# Altium PCB Group15_f.PcbDoc
Units mil, origin at the board's own origin, x right, y up, seen from the top; angles counter-clockwise.
Board outline 10825 x 6635 mil, 2 copper layers (Top Layer, Bottom Layer); 40 components, 20 nets, 140 pads, 1 vias.
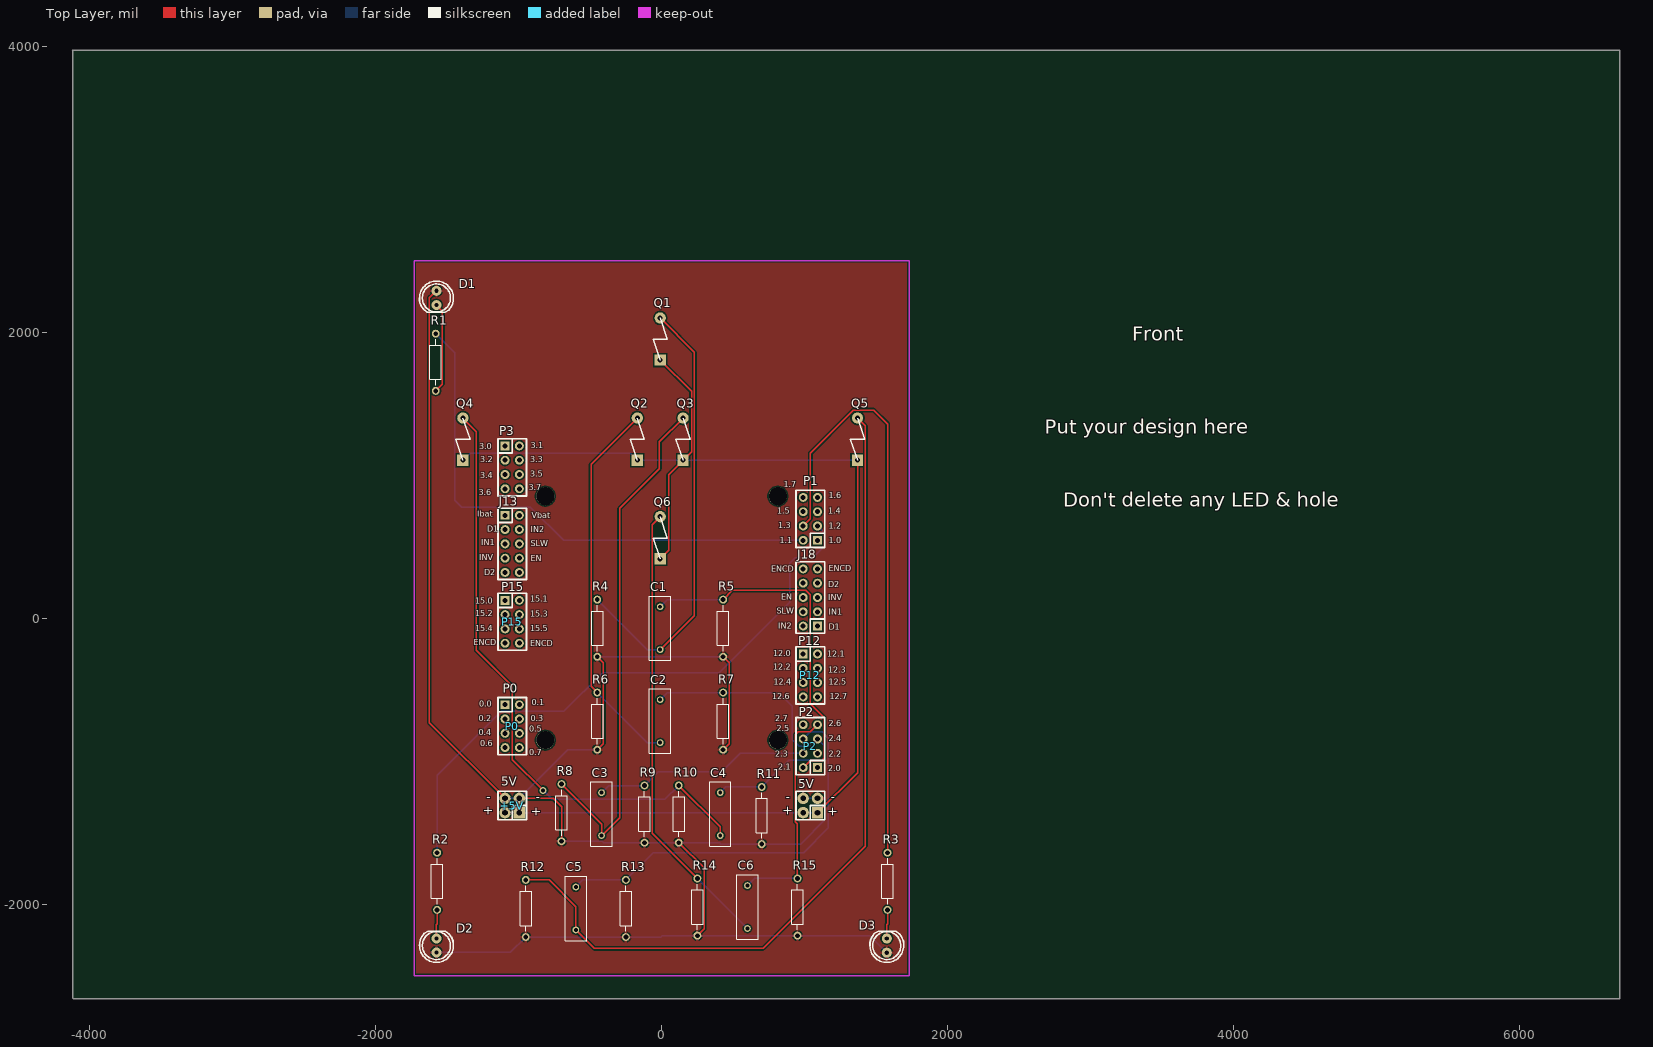
[diagram p0: Top Layer view]
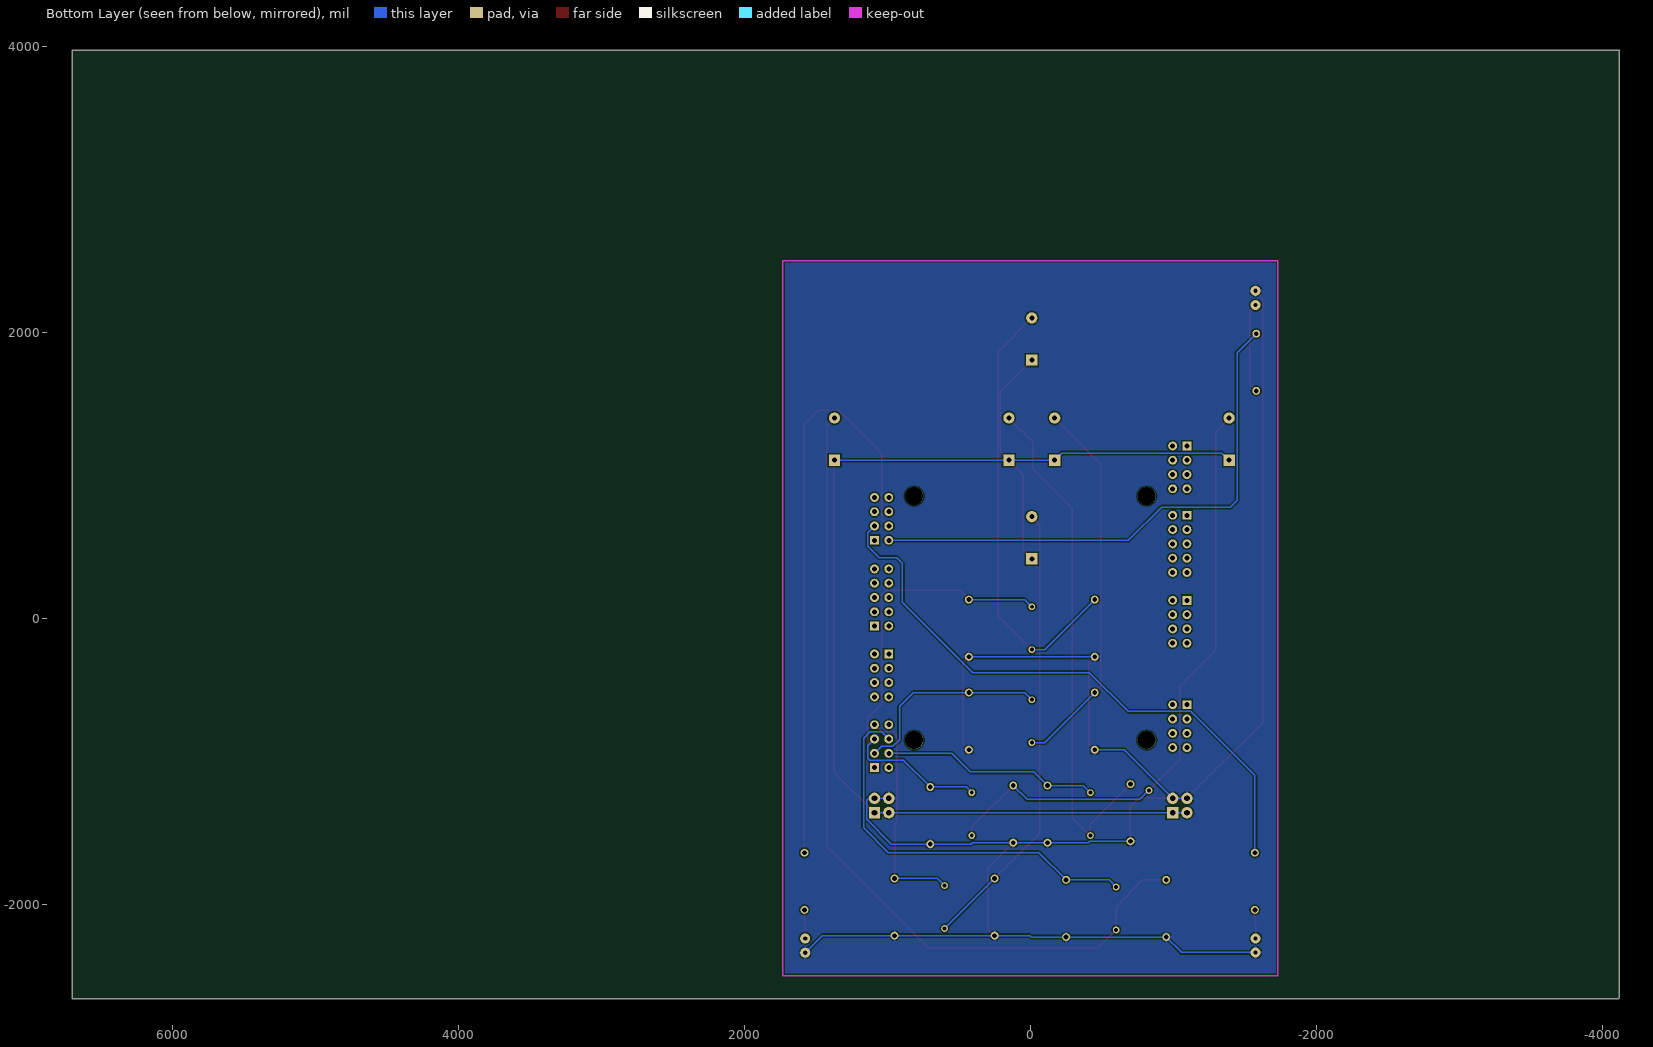
[diagram p1: Bottom Layer view, seen from below]

## Layer stack, top to bottom
Top Solder: solder mask 0.4, Solder Resist, Dk 3.5
Top Layer: signal copper 1.4
Dielectric1: dielectric 12.6, FR-4, Dk 4.8
Bottom Layer: signal copper 1.4
Bottom Solder: solder mask 0.4, Solder Resist, Dk 3.5

## Board outline
-4118.11,-2656.69 -4113.11,-2661.69 6701.89,-2661.69 6701.89,3973.31 -4123.11,3973.31 -4118.11,3968.31 -4118.11,-2656.69

## Design rules (kind name [scope] priority, off if disabled: settings)
Clearance [All] p1: gap=10 ignorepadtopadclearanceinfootprint=FALSE except(0: Arc-Hole Track-Hole SMDPad-Hole THPad-Hole Via-Hole Fill-Hole Poly-Hole Region-Hole Text-Hole)
PolygonConnect [All] p1: connectstyle=Direct reliefconductorwidth=20 reliefentries=4 polygonreliefangle="90 Angle" airgapwidth=10
RoutingVias [All] p1: holewidth=28 width=50 viastyle="Through Hole" minholewidth=28 minwidth=50 maxholewidth=28 maxwidth=50
SilkToSolderMaskClearance SilkscreenOverComponentPads [IsPad] p1: minsilkscreentomaskgap=10 clearancetoexposedcopper=TRUE
SolderMaskExpansion [All] p1: expansion=4 istentingtop=FALSE
Width [All] p1: maxlimit=30 minlimit=10 preferedwidth=10 minimp=50.000000 maximp=50.000000 favimp=50.000000
29 further rules are at their usual default settings.

## Components (designator, comment, footprint, x,y, rotation, side; value= is the part's Value field where it differs from the comment)
5V "5V" IDC4 1090,-1360 r90 top locked
+5V "5V" IDC4 -995,-1360 r90 top locked
C1 "Cap" RAD-0.3 -10,-70 r90 top value=100pF
C2 "Cap" RAD-0.3 -10,-720 r90 top value=10nF
C3 "Cap" RAD-0.3 -420,-1370 r90 top value=10nF
C4 "Cap" RAD-0.3 410,-1370 r90 top value=10nF
C5 "Cap" RAD-0.3 -600,-2030 r90 top value=10nF
C6 "Cap" RAD-0.3 600,-2020 r90 top value=10nF
D1 "LED" LED0.1/5MM#1 -1574.8,2189.76 r180 top locked
D2 "LED" LED0.1/5MM#2 -1574.8,-2239.37 r0 top locked
D3 "LED" LED0.1/5MM#1 1574.8,-2239.37 r0 top locked
J13 "CON10" IDC10 -1095,720 r270 top locked
J18 "CON10" IDC10 1090,-55 r90 top locked
P0 "P0" idc8 -1095,-605 r270 top locked
P1 "P1" idc8 1090,545 r90 top locked
P2 "P2" idc8 1090,-1045 r90 top locked
P3 "P3" idc8 -1095,1205 r270 top locked
P12 "P12" idc8 990,-250 r270 top locked
P15 "P15" IDC8 -1095,125 r270 top locked
Q1 "VEMT3700" VEMT3700 140,1705 r90 top
Q2 "VEMT3700" VEMT3700 -20,1005 r90 top
Q3 "VEMT3700" VEMT3700 300,1005 r90 top
Q4 "VEMT3700" VEMT3700 -1240,1005 r90 top
Q5 "VEMT3700" VEMT3700 1520,1005 r90 top
Q6 "VEMT3700" VEMT3700 140,315 r90 top
R1 "Res2" AXIAL-0.4 -1580,1790 r90 top value=47K
R2 "Res2" AXIAL-0.4 -1570,-1840 r90 top value=47K
R3 "Res2" AXIAL-0.4 1580,-1840 r90 top value=47K
R4 "Res2" AXIAL-0.4 -450,-70 r90 top value=47K
R5 "Res2" AXIAL-0.4 430,-70 r90 top value=180K
R6 "Res2" AXIAL-0.4 -450,-720 r90 top value=47K
R7 "Res2" AXIAL-0.4 430,-720 r90 top value=47K
R8 "Res2" AXIAL-0.4 -700,-1360 r90 top value=47K
R9 "Res2" AXIAL-0.4 -120,-1370 r90 top value=47K
R10 "Res2" AXIAL-0.4 120,-1370 r90 top value=47K
R11 "Res2" AXIAL-0.4 700,-1380 r90 top value=47K
R12 "Res2" AXIAL-0.4 -950,-2030 r90 top value=47K
R13 "Res2" AXIAL-0.4 -250,-2030 r90 top value=47K
R14 "Res2" AXIAL-0.4 250,-2020 r90 top value=47K
R15 "Res2" AXIAL-0.4 950,-2020 r90 top value=47K

## Footprints (in the part's own frame and the unit in brackets; to place one, negate y for a bottom-side part, rotate by r counter-clockwise, add the part's x,y. Pads: shape width x height; smd on the part's side, far side on the other; paste and mask are expansions set on the pad)
AXIAL-0.4 [mm] "Axial Device, Thru-Hole; 2 Leads; 0.4 in Pin Spacing"
  round 1.4 hole 0.85: 1(-5.08,0) 2(5.08,0)
  silkscreen extent -4.06,-1.02 4.06,1.02
IDC4 [mil]
  rect 80x80 hole 40: 1(0,0)
  round 80 hole 40: 2(0,100) 3(100,0) 4(100,100)
  silkscreen extent -50,-50 150,150
idc8 [mil]
  rect 62x62 hole 35: 1(0,0)
  round 62 hole 35: 2(0,100) 3(100,0) 4(100,100) 5(200,0) 6(200,100) 7(300,0) 8(300,100)
  silkscreen extent -50,-50 350,150
IDC8 [mil]
  rect 62x62 hole 35: 1(0,0)
  round 62 hole 35: 2(0,100) 3(100,0) 4(100,100) 5(200,0) 6(200,100) 7(300,0) 8(300,100)
  silkscreen extent -50,-50 350,150
IDC10 [mil]
  rect 62x62 hole 35: 1(0,0)
  round 62 hole 35: 2(0,100) 3(100,0) 4(100,100) 5(200,0) 6(200,100) 7(300,0) 8(300,100) 9(400,0) 10(400,100)
  silkscreen extent -50,-50 450,150
LED0.1/5MM#1 [mil]
  round 70 hole 30: A(0,0) K(0,-100)
  silkscreen extent -118,-168 118,50
LED0.1/5MM#2 [mil]
  round 70 hole 30: A(0,0) K(0,-98.42)
  silkscreen extent -118,-168 118,50
RAD-0.3 [mm] "Radial Cap, Thru-Hole; 2 Leads; 0.3 in Pin Spacing"
  round 1.2 hole 0.7: 1(-3.81,0) 2(3.81,0)
  silkscreen extent -5.72,-1.9 5.71,1.91
VEMT3700 [mm]
  rect 2x2 hole 0.9: 1(2.54,3.81)
  round 2 hole 0.9: 2(10.033,3.81)
  silkscreen extent 2.54,2.54 10.03,5.08

## Part data
5V +5V: library part CON4, "Connector"
C1 C2 C3 C4 C5 C6: "Capacitor", LatestRevisionDate=17-Jul-2002, LatestRevisionNote="Re-released for DXP Platform.", PackageDescription="Radial Cap, Thru-Hole; 2 Leads; 0.3 in Pin Spacing", PackageReference=RAD-0.3, Published=8-Jun-2000, Publisher="Altium Limited"
J13 J18: "Connector"
P0 P1 P2 P3: library part CON8, "Connector"
P12 P15: library part CON8_1, "Connector"
Q1 Q2 Q3 Q4 Q5 Q6: "Silicon NPN Phototransistor"
R1 R2 R3 R4 R5 R6 R7 R8 R9 R10 R11 R12 R13 R14 R15: "Resistor", LatestRevisionDate=17-Jul-2002, LatestRevisionNote="Re-released for DXP Platform.", PackageDescription="Axial Device, Thru-Hole; 2 Leads; 0.4 in Pin Spacing", PackageReference=AXIAL-0.4, Published=8-Jun-2000, Publisher="Altium Limited"

## Free pads (board coordinates)
  round 125.98 hole 125.98 unplated: 1(-813,-853) 1(-813,853) 1(813,-853) 1(813,853)

## Via types
v1: diameter 50, hole 28, Top Layer to Bottom Layer, 1 vias

## Nets (pads, with @x,y where several pads share a name; then routed paths per layer and width w, separated by ;. In a path a pad name is that pad's centre, name@x,y a point inside that pad or via, vN(x,y) a via of type N, cw(c..) or ccw(c..) an arc to the next point about the centre after c; other vN are vias at no path point)
+5V: 5V.1 5V.2 +5V.1 +5V.2 Q1.1 Q2.1 Q3.1 Q4.1 Q5.1 Q6.1 | length 9139.7
  Top Layer w10: Q6.1 48.89,473.89 48.89,1003.89 Q3.1 208.89,1163.89 208.89,1586.11 Q1.1 ; 5V.1 1370.89,-1079.11 1370.89,985.31 1370,986.2 Q5.1
  Bottom Layer w10: Q4.1 -1339.69,1155.31 -220.31,1155.31 Q2.1 Q3.1 Q5.1 ; +5V.2 +5V.1 5V.2 5V.1
GND: 5V.3 5V.4 +5V.3 +5V.4 D1.K D2.K D3.K R4.1 R5.1 R6.1 R7.1 R8.1 R9.1 R10.1 R11.1 R12.1 R13.1 R14.1 R15.1 | length 13598.9
  Top Layer w10: D1.K -1625.11,2239.46 -1625.11,-729.89 +5V.4 ; +5V.3 -758.11,-1260 -700,-1318.11 R8.1 ; R6.1 -407.11,-877.11 -407.11,-312.89 R4.1 ; R10.1 296.89,-1746.89 296.89,-2173.11 R14.1 ; R7.1 472.89,-877.11 472.89,-312.89 R5.1
  Bottom Layer w10: D2.K -1057.79,-2337.79 R12.1 R13.1 -5.11,-2230 4.89,-2220 R14.1 R15.1 1455.43,-2220 D3.K ; +5V.4 +5V.3 -655,-920 R6.1 ; R8.1 -415.11,-1560 -405.11,-1570 R9.1 R10.1 404.89,-1570 414.89,-1580 R11.1 972.58,-1580 1145.89,-1406.69 1145.89,-1274 1131.89,-1260 5V.3 5V.4 ; R4.1 R5.1
LED1: P1.2 R1.2 | length 3773
  Bottom Layer w10: R1.2 -1445.11,1855.11 -1445.11,823.31 -1399.11,777.31 -917.11,777.31 -684.8,545 P1.2
LED2: P1.3 R2.2 | length 4232.3
  Bottom Layer w10: R2.2 -1570,-1099.58 -1122.11,-651.69 -684.11,-651.69 -413.11,-380.69 403.89,-380.69 894.89,110.31 894.89,383.31 934.89,423.31 1056.89,423.31 1136.89,503.31 1136.89,598.11 P1.3
LED3: P1.4 R3.2 | length 4233.2
  Top Layer w10: P1.4 1039.89,694.89 1039.89,1154.31 1340.89,1455.31 1482.89,1455.31 1580,1358.2 R3.2
NetC1_1: C1.1 Q1.2 R4.2 | length 3102.9
  Top Layer w10: C1.1 228.89,18.89 228.89,1861.11 Q1.2
  Bottom Layer w10: R4.2 -100,-220 C1.1
NetC2_1: C2.1 Q2.2 R6.2 | length 2656.7
  Top Layer w10: R6.2 -493.11,-476.89 -493.11,1076.89 Q2.2
  Bottom Layer w10: R6.2 -100,-870 C2.1
NetC3_1: C3.1 Q3.2 R8.2 | length 3632.1
  Top Layer w10: R8.2 -420,-1440 C3.1 -294.11,-1394.11 -294.11,767.31 -15.11,1046.31 -15.11,1234.89 Q3.2
NetC4_1: C4.1 Q4.2 R10.2 | length 4322.2
  Top Layer w10: Q4.2 -1295.11,1305.11 -1295.11,-223.69 -1044.11,-474.69 -1044.11,-988.69 v1(-829.11,-1203.69) ; R10.2 410,-1460 C4.1
  Bottom Layer w10: v1(-829.11,-1203.69) -765.11,-1267.69 22.31,-1267.69 R10.2
NetC5_1: C5.1 Q5.2 R12.2 | length 5981.4
  Top Layer w10: R12.2 -786.69,-1830 -600,-2016.69 C5.1 -471.31,-2308.69 709.89,-2308.69 1424.89,-1593.69 1424.89,1345.11 Q5.2
NetC6_1: C6.1 Q6.2 R14.2 | length 3178.3
  Top Layer w10: Q6.2 -65.11,654.89 -65.11,-1504.89 R14.2
  Bottom Layer w10: R14.2 C6.1
NetD1_A: D1.A R1.1 | length 636.5
  Top Layer w10: R1.1 -1533.11,1636.89 -1533.11,2148.07 D1.A
NetD2_A: D2.A R2.1 | length 201.4
  Top Layer w10: D2.A -1574.8,-2142.69 -1570,-2137.89 R2.1
NetD3_A: D3.A R3.1 | length 201.5
  Top Layer w10: D3.A 1574.8,-2142.69 1580,-2137.5 R3.1
Vout_1: C1.2 P2.2 R5.2 | length 2468.3
  Top Layer w10: R5.2 495.31,195.31 1007.89,195.31 1039.89,163.31 1039.89,-599.69 1136.89,-696.69 1136.89,-980.11 1121.89,-995.11 1039.89,-995.11 P2.2
  Bottom Layer w10: C1.2 40,130 R5.2
Vout_2: C2.2 P2.3 R7.2 | length 1432.5
  Bottom Layer w10: C2.2 40,-520 R7.2 817.89,-520 914.89,-617 914.89,-848.69 960.89,-894.69 1039.69,-894.69 P2.3
Vout_3: C3.2 P2.4 R9.2 | length 1523.9
  Bottom Layer w10: C3.2 -370,-1170 R9.2 -24.69,-1074.69 419.89,-1074.69 549.58,-945 P2.4
Vout_4: C4.2 P2.5 R11.2 | length 979.4
  Bottom Layer w10: C4.2 450,-1180 R11.2 887.31,-992.69 1121.89,-992.69 1136.89,-977.69 1136.89,-891.89 P2.5
Vout_5: C5.2 P2.6 R13.2 | length 2779.5
  Bottom Layer w10: C5.2 -550,-1830 R13.2 -58.69,-1638.69 992.89,-1638.69 1165.89,-1465.69 1165.89,-838.69 1121.89,-794.69 1040.31,-794.69 P2.6
Vout_6: C6.2 P2.7 R15.2 | length 1565.1
  Top Layer w10: R15.2 950,-1438.69 934.89,-1423.58 934.89,-816.69 956.89,-794.69 1040.31,-794.69 P2.7
  Bottom Layer w10: C6.2 650,-1820 R15.2
pads on no net: J13.1 J13.2 J13.3 J13.4 J13.5 J13.6 J13.7 J13.8 J13.9 J13.10 J18.1 J18.2 J18.3 J18.4 J18.5 J18.6 J18.7 J18.8 J18.9 J18.10 P0.1 P0.2 P0.3 P0.4 P0.5 P0.6 P0.7 P0.8 P1.1 P1.5 P1.6 P1.7 P1.8 P2.1 P2.8 P3.1 P3.2 P3.3 P3.4 P3.5 P3.6 P3.7 P3.8 P12.1 P12.2 P12.3 P12.4 P12.5 P12.6 P12.7 P12.8 P15.1 P15.2 P15.3 P15.4 P15.5 P15.6 P15.7 P15.8

## Polygon pours and split planes (outlines as drawn)
GND on Top Layer "GND_L01_P001" (solid, remove dead copper, pour order 1): -1730,2500 -1730,-2500 1730,-2500 1730,2500
GND on Bottom Layer "GND_L02_P002" (solid, remove dead copper, pour order 2): -1730,2500 -1730,-2500 1730,-2500 1730,2500

## Keep-outs
Keep-Out Layer:
  lines w10: -1730,-2500 1730,-2500 1730,2500 -1730,2500 -1730,-2500

## Silkscreen, mask and mechanical layers (free items; w line width, h text height)
Top Overlay:
  text "Front" at 3290,1940 h100
  text "Put your design here" at 2680,1290 h100
  text "3.1" at -915,1190 h40
  text "3.0" at -1275,1180 h40
  text "3.2" at -1270,1090 h40
  text "3.3" at -920,1090 h40
  text "3.5" at -920,990 h40
  text "3.4" at -1270,980 h40
  text "1.7" at 855,915 h40
  text "3.7" at -930,895 h40
  text "3.6" at -1280,860 h40
  text "1.6" at 1170,840 h40
  text "Don't delete any LED & hole" at 2810,780 h100
  text "1.5" at 810,730 h40
  text "1.4" at 1165,730 h40
  text "Ibat" at -1290,710 h40
  text "Vbat" at -910,700 h40
  text "1.3" at 815,630 h40
  text "1.2" at 1170,625 h40
  text "D1" at -1220,605 h40
  text "IN2" at -915,600 h40
  text "1.1" at 825,525 h40
  text "1.0" at 1170,525 h40
  text "IN1" at -1260,510 h40
  text "SLW" at -915,505 h40
  text "INV" at -1275,405 h40
  text "EN" at -915,400 h40
  text "ENCD" at 1170,330 h40
  text "ENCD" at 765,325 h40
  text "D2" at -1240,300 h40
  text "D2" at 1165,215 h40
  text "EN" at 835,130 h40
  text "INV" at 1165,125 h40
  text "15.1" at -920,115 h40
  text "15.0" at -1305,100 h40
  text "SLW" at 805,30 h40
  text "IN1" at 1170,25 h40
  text "15.2" at -1305,15 h40
  text "15.3" at -920,10 h40
  text "IN2" at 815,-75 h40
  text "D1" at 1170,-80 h40
  text "15.4" at -1305,-90 h40
  text "15.5" at -920,-90 h40
  text "ENCD" at -1315,-190 h40
  text "ENCD" at -920,-195 h40
  text "12.0" at 780,-265 h40
  text "12.1" at 1160,-270 h40
  text "12.2" at 780,-360 h40
  text "12.3" at 1165,-380 h40
  text "12.4" at 785,-465 h40
  text "12.5" at 1170,-465 h40
  text "12.6" at 775,-565 h40
  text "12.7" at 1175,-565 h40
  text "0.1" at -910,-610 h40
  text "0.0" at -1275,-620 h40
  text "0.2" at -1280,-720 h40
  text "0.3" at -915,-720 h40
  text "2.7" at 795,-720 h40
  text "2.6" at 1170,-755 h40
  text "2.5" at 805,-790 h40
  text "0.5" at -925,-795 h40
  text "0.4" at -1280,-820 h40
  text "2.4" at 1170,-860 h40
  text "0.6" at -1270,-895 h40
  text "0.7" at -925,-960 h40
  text "2.3" at 795,-970 h40
  text "2.2" at 1170,-970 h40
  text "2.1" at 815,-1060 h40
  text "2.0" at 1165,-1070 h40
  text "-" at -1195,-1230 h60 r180
  text "-" at -850,-1230 h60 r180
  text "-" at 900,-1230 h60 r180
  text "-" at 1215,-1230 h60 r180
  text "+" at -1185,-1380 h60 r90
  text "+" at 910,-1380 h60 r90
  text "+" at -850,-1390 h60 r90
  text "+" at 1225,-1390 h60 r90